# Altium PCB PCB_template.PcbDoc
Units mm, origin at the board's own origin, x right, y up, seen from the top; angles counter-clockwise.
Board outline 50 x 50 mm, 2 copper layers (Top Layer, Bottom Layer); 3 components, 0 nets, 16 pads, 0 vias.
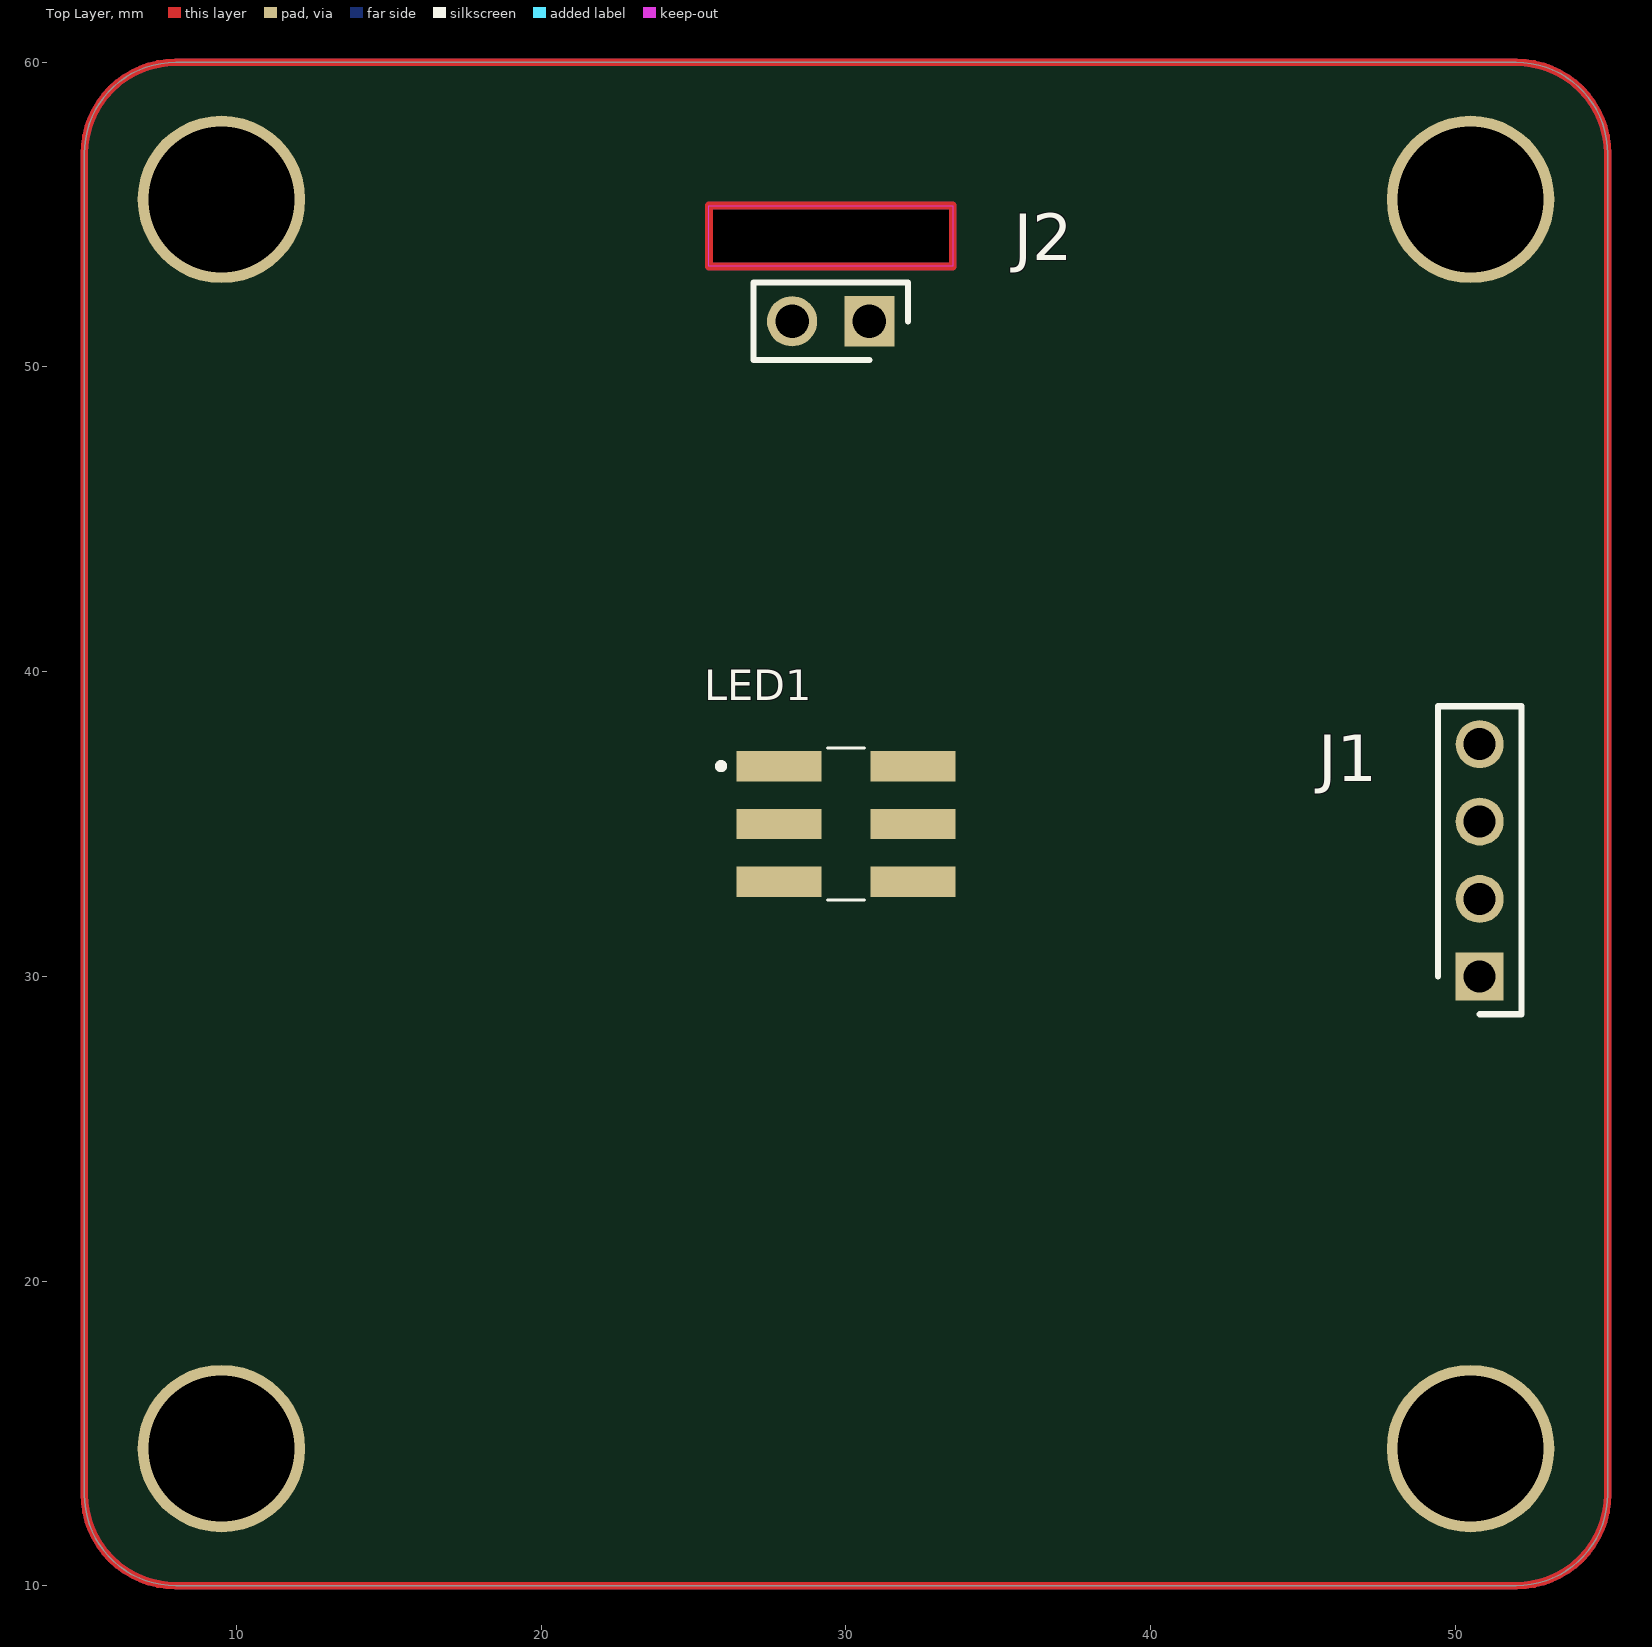
[diagram p0: Top Layer view]
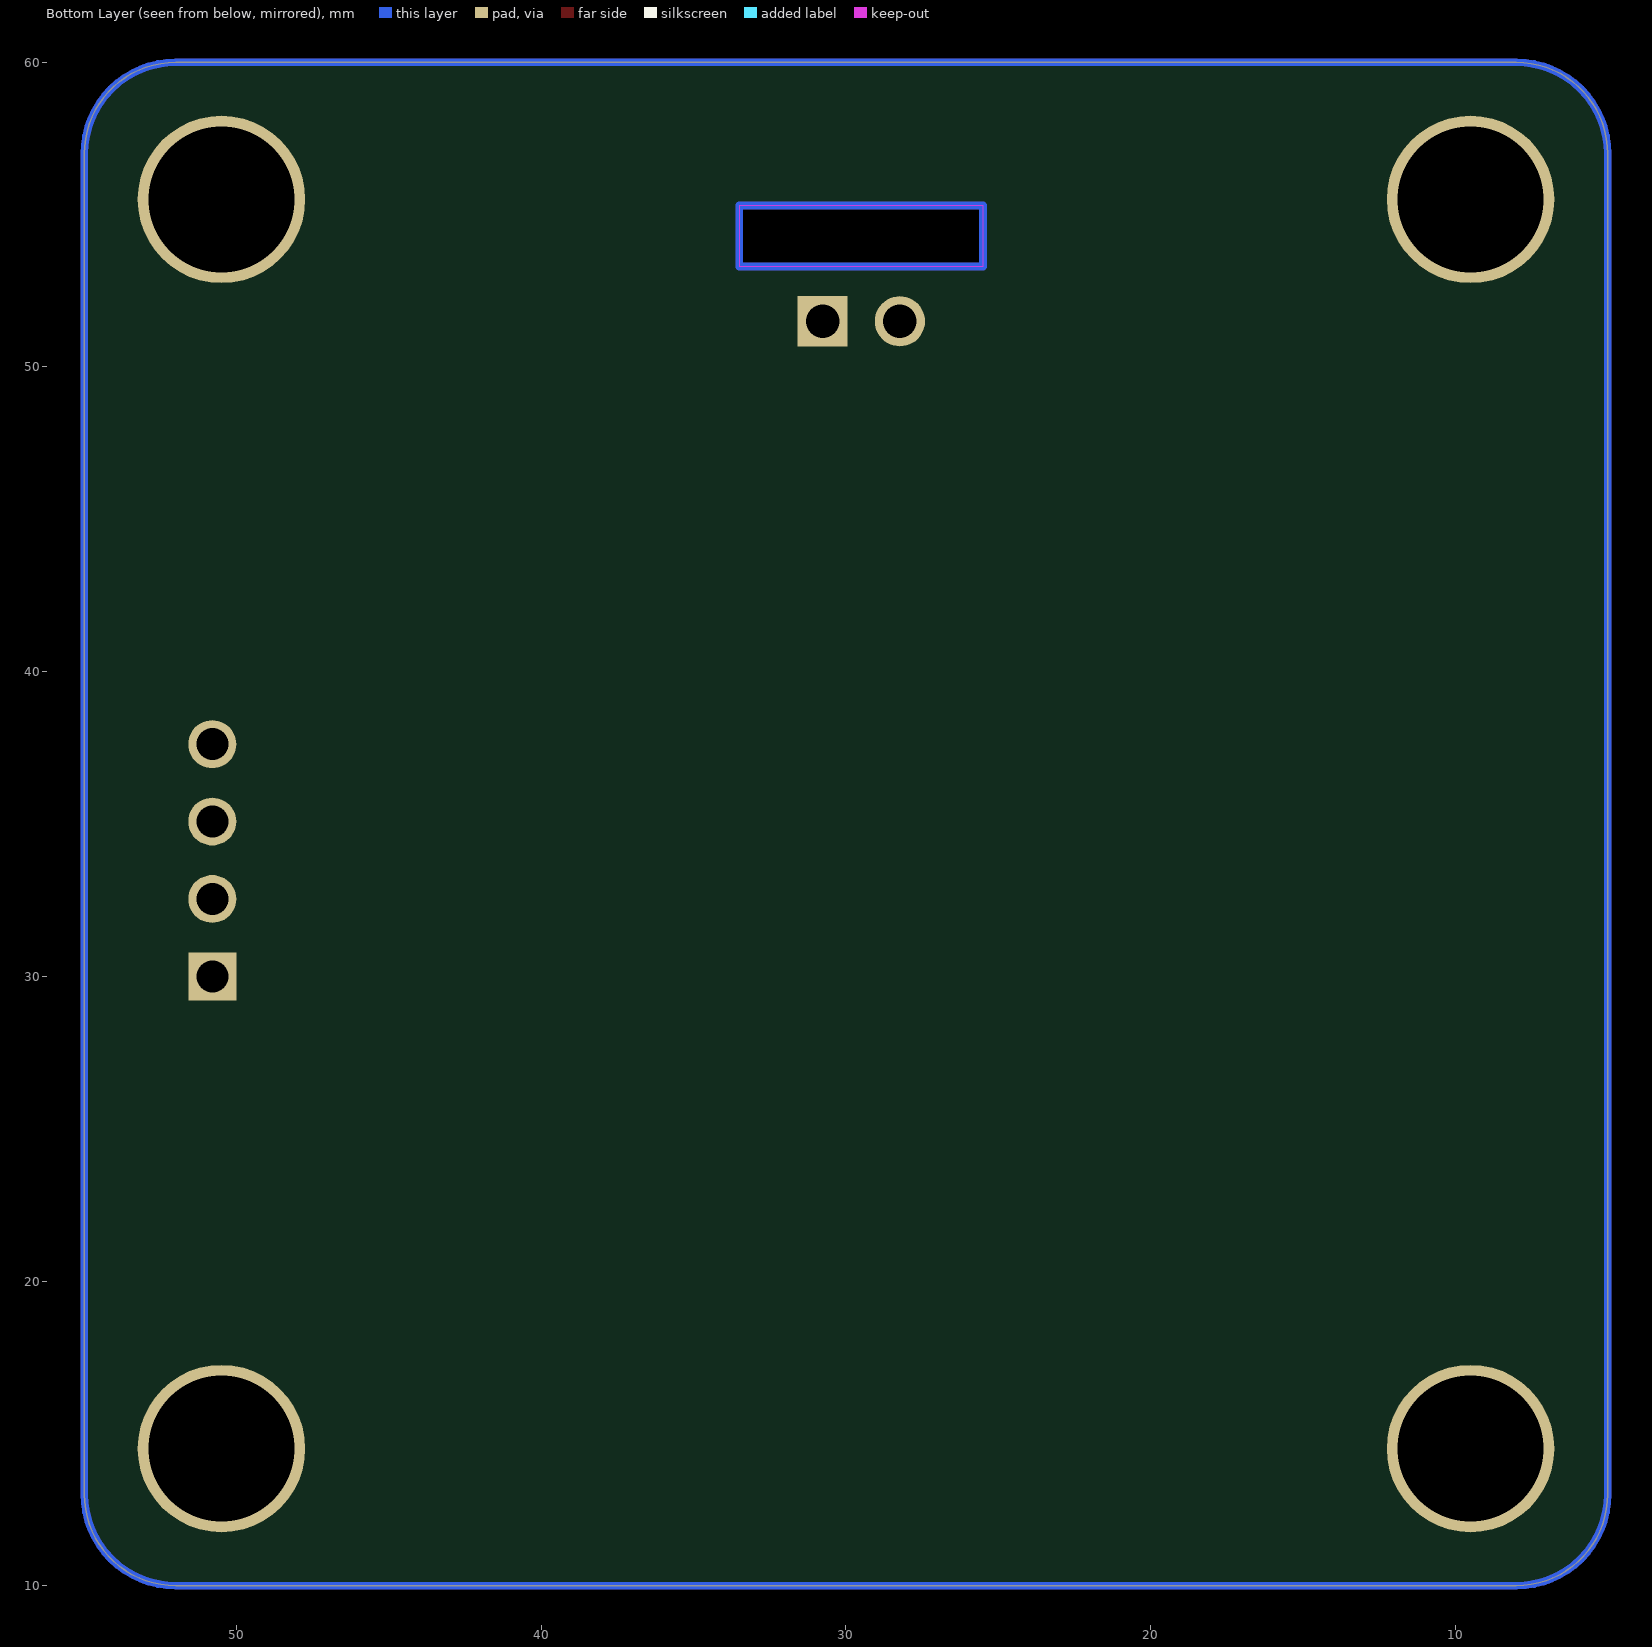
[diagram p1: Bottom Layer view, seen from below]

## Layer stack, top to bottom
Top Solder: solder mask 0.0102, Solder Resist, Dk 3.5
Top Layer: signal copper 0.0356
Dielectric 1: dielectric 0.32, FR-4, Dk 4.8
Bottom Layer: signal copper 0.0356
Bottom Solder: solder mask 0.0102, Solder Resist, Dk 3.5

## Board outline
5,13 5,57 cw(c8,57) 8,60 52,60 cw(c52,57) 55,57 55,13 cw(c52,13) 52,10 8,10 cw(c8,13)
cut-out: 25.5,53.3 25.5,55.3 33.5,55.3 33.5,53.3

## Design rules (kind name [scope] priority, off if disabled: settings)
Clearance Clearance_1 [All] p1: gap=0.254 ignorepadtopadclearanceinfootprint=FALSE except(0: Arc-Hole Track-Hole SMDPad-Hole THPad-Hole Via-Hole Fill-Hole Poly-Hole Region-Hole Text-Hole)
Clearance [All] p2: gap=0.254 ignorepadtopadclearanceinfootprint=FALSE except(0: Arc-Hole Track-Hole SMDPad-Hole THPad-Hole Via-Hole Fill-Hole Poly-Hole Region-Hole Text-Hole)
PolygonConnect [All] p1: connectstyle=Relief reliefconductorwidth=0.254 reliefentries=4 polygonreliefangle="90 Angle" airgapwidth=0.254
RoutingVias [All] p1: holewidth=0.711 width=1.27 viastyle="Through Hole" minholewidth=0.711 minwidth=1.27 maxholewidth=0.711 maxwidth=1.27
SolderMaskExpansion [All] p1: expansion=0.102
Width [All] p1: maxlimit=0.254 minlimit=0.254 preferedwidth=0.254
30 further rules are at their usual default settings.

## Components (designator, comment, footprint, x,y, rotation, side; value= is the part's Value field where it differs from the comment)
J1 "0022032041" HDRV4W87P0X254_1X4_991X236X1155P 50.8,30 r90 top
J2 "0901200122" HDRV2W90P0X254_1X2_508X254X560P 30.77,51.5 r180 top
LED1 "150505M173300" 150505M173300 30,35 r0 top locked

## Footprints (in the part's own frame and the unit in brackets; to place one, negate y for a bottom-side part, rotate by r counter-clockwise, add the part's x,y. Pads: shape width x height; smd on the part's side, far side on the other; paste and mask are expansions set on the pad)
150505M173300 [mm]
  rect 2.8x1 smd: 1(-2.2,1.9) 2(2.2,1.9) 3(-2.2,0) 4(2.2,0) 5(-2.2,-1.9) 6(2.2,-1.9)
  silkscreen extent -4.2,-2.5 0.6,2.5, body extent -2.5,-2.5 2.5,2.5, height 1.9
HDRV2W90P0X254_1X2_508X254X560P [mm]
  rect 1.65x1.65 hole 1.1: 1(0,0)
  round 1.65 hole 1.1: 2(2.54,0)
  silkscreen extent -1.27,-1.27 3.81,1.27, body extent -1.27,-1.27 3.81,1.27, height 5.6
HDRV4W87P0X254_1X4_991X236X1155P [mm]
  rect 1.575x1.575 hole 1.05: 1(0,0)
  round 1.575 hole 1.05: 2(2.54,0) 3(5.08,0) 4(7.62,0)
  silkscreen extent -1.24,-1.37 8.86,1.37, body extent -1.14,-1.18 8.76,1.18, height 11.55

## Part data
J1 J2: "Connector", Manufacturer_Name=Molex, Mouser Part Number=N/A, Mouser Price/Stock=https://www.mouser.com/Search/Refine.aspx?Keyword=N%2FA
  J1: Datasheet Link=http://www.molex.com/pdm_docs/sd/022032041_sd.pdf, Height=11.55mm, Manufacturer_Part_Number=0022032041
  J2: Datasheet Link=http://www.molex.com/pdm_docs/sd/901200122_sd.pdf, Height=5.6mm, Manufacturer_Part_Number=0901200122
LED1: "LED", Manufacturer_Name="Wurth Elektronik", Mouser Part Number=710-150505M173300, RS Part Number=1766248P, Datasheet Link=https://katalog.we-online.de/led/datasheet/150505M173300.pdf, Height=1.8mm, Manufacturer_Part_Number=150505M173300, Mouser Price/Stock=https://www.mouser.com/Search/Refine.aspx?Keyword=710-150505M173300, RS Price/Stock=http://uk.rs-online.com/web/p/products/1766248P

## Free pads (board coordinates)
  round 5.5 hole 4.8: 7(9.5,14.5) 7(9.5,55.5) 7(50.5,14.5) 7(50.5,55.5)

## Nets (pads, with @x,y where several pads share a name; then routed paths per layer and width w, separated by ;. In a path a pad name is that pad's centre, name@x,y a point inside that pad or via, vN(x,y) a via of type N, cw(c..) or ccw(c..) an arc to the next point about the centre after c; other vN are vias at no path point)
pads on no net: J1.1 J1.2 J1.3 J1.4 J2.1 J2.2 LED1.1 LED1.2 LED1.3 LED1.4 LED1.5 LED1.6

## Other copper
Multi-Layer:
  lines w0.254: 5,13 ccw(c8,13) 8,10 52,10 ccw(c52,13) 55,13 55,57 ccw(c52,57) 52,60 8,60 ccw(c8,57) 5,57 5,13 ; 25.5,53.3 25.5,55.3 33.5,55.3 33.5,53.3 25.5,53.3

## Dimensions
33.5,53.3 to 30.77,51.5 on Top Layer